# Altium PCB Copy of DAQ.PcbDoc (part 2 of 2)
Units mil, origin at the board's own origin, x right, y up, seen from the top; angles counter-clockwise.
Board outline 2793.12 x 2548.73 mil, 4 copper layers (Top Layer, GND, 3V3, Bottom Layer), stack 23.756 mil thick; 148 components, 93 nets, 486 pads, 25 vias.
Unrouted connection lines stored in the file: 356.
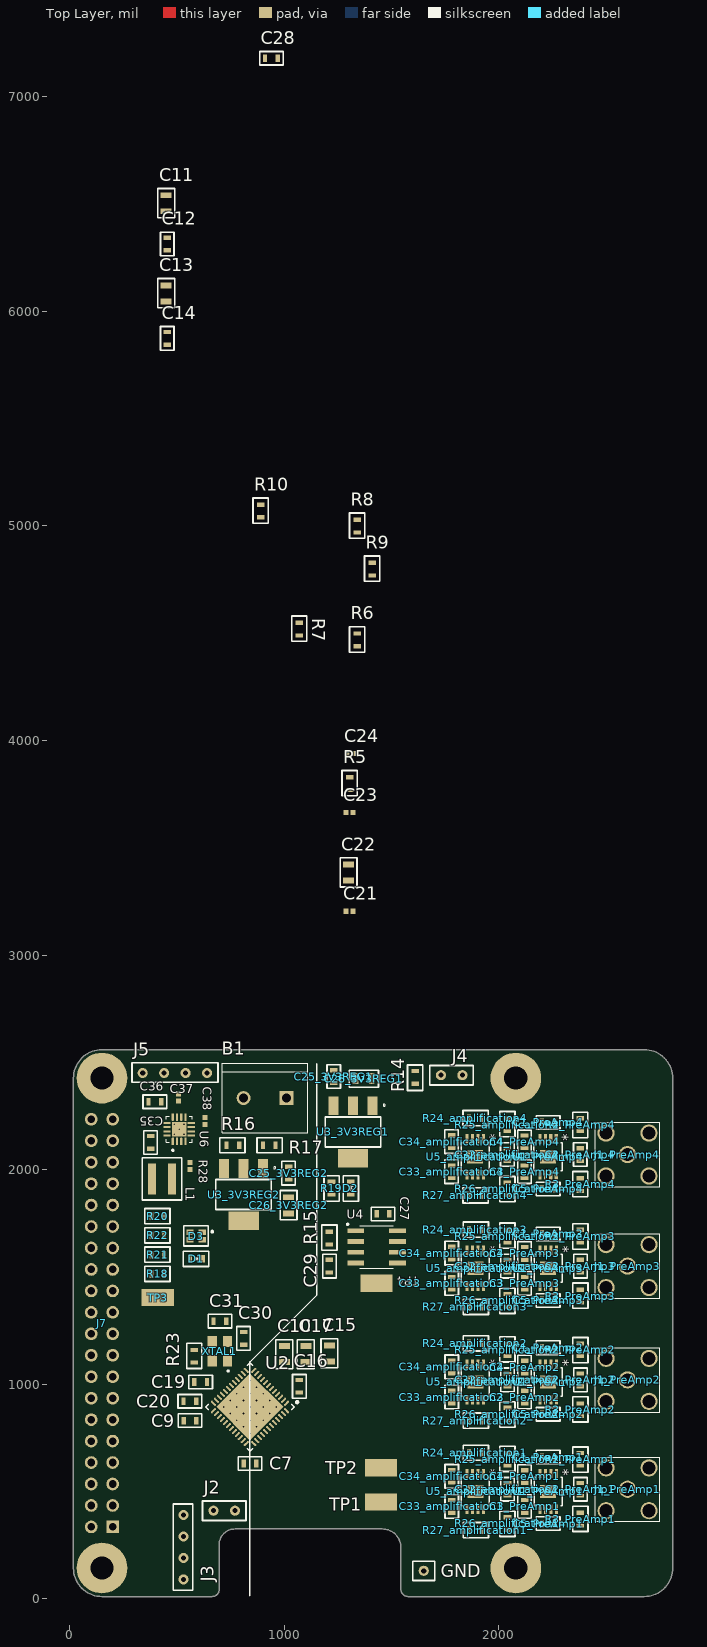
[diagram p0: Top Layer view]

## Part data (continued)
D1 D2: library part LTST-C191KGKT, "LED Uni-Color Green 574nm 2-Pin Chip LED T/R", Case/Package=0603, Case Code (Metric)=1608, Color=Green, Forward Current=30mA, Forward Voltage=2V, Lens Color=Colorless, Manufacturer 1="Vishay Lite-On", Max Operating Temperature=85°C, Min Operating Temperature=-55°C, Package Quantity=1, Power Dissipation=75mW, Reverse Voltage=5V, Supplier Part Number 1=160-1446-1-ND, Test Current=20mA, Case Code (Imperial)=0603, ComponentLink1Description=https://datasheet.ciiva.com/12400/100-ltst-c191kgkt-53586-12400818.pdf?src-supplier=Mouser, ComponentLink1URL=https://datasheet.ciiva.com/12400/100-ltst-c191kgkt-53586-12400818.pdf?src-supplier=Mouser, ComponentLink2Description=https://datasheet.ciiva.com/11773/0900766b80dc02b1-11773629.pdf?src-supplier=RSComponents, ComponentLink2URL=https://datasheet.ciiva.com/11773/0900766b80dc02b1-11773629.pdf?src-supplier=RSComponents, ComponentLink3Description=https://datasheet.ciiva.com/16215/ltst-c191kgkt-16215151.pdf?src-supplier=Future+Electronics, ComponentLink3URL=https://datasheet.ciiva.com/16215/ltst-c191kgkt-16215151.pdf?src-supplier=Future+Electronics, ComponentLink4Description=https://datasheet.ciiva.com/2109/s-110-ltst-c191kgkt-2109973.pdf?src-supplier=Digi-Key, ComponentLink4URL=https://datasheet.ciiva.com/2109/s-110-ltst-c191kgkt-2109973.pdf?src-supplier=Digi-Key, ComponentLink5Description=https://datasheet.ciiva.com/2109/s-110-ltst-c191kgkt-2109974.pdf?src-supplier=Digi-Key, ComponentLink5URL=https://datasheet.ciiva.com/2109/s-110-ltst-c191kgkt-2109974.pdf?src-supplier=Digi-Key, ComponentLink6Description=https://datasheet.ciiva.com/2109/s-110-ltst-c191kgkt-2109975.pdf?src-supplier=Digi-Key, ComponentLink6URL=https://datasheet.ciiva.com/2109/s-110-ltst-c191kgkt-2109975.pdf?src-supplier=Digi-Key, ComponentLink7Description=https://datasheet.ciiva.com/15223/getdatasheetpartid-103913-15223276.pdf?src-supplier=Verical, ComponentLink7URL=https://datasheet.ciiva.com/15223/getdatasheetpartid-103913-15223276.pdf?src-supplier=Verical, Depth=0.8mm, Dominant Wavelength=571nm, Height=0.55mm, Illumination Color=Green, Lead Free="Lead Free", Length=1.6mm, Lens Style=Diffused,Colorless,Rectangular,Clear, Lens Transparency=Clear, Luminous Intensity=35mcd, Manufacturer Part Number 1=LTST-C191KGKT, Mount="Surface Mount", Number of Elements=1, Number of LEDs=1, Number of Pins=2, Packaging="Tape and Reel", Power Rating=75mW, Pricing 1="1=0.28000, 10=0.20100, 100=0.09540, 500=0.06364, 1000=0.04984, 2500=0.04878 (USD)", Radiation Hardening=No, RoHS=Yes, Stock 1=1002642, Supplier 1=Digi-Key, Viewing Angle=130°, Wavelength=574nm, Width=0.8mm
D3: library part LTST-C19HE1WT, "Lite-On LTST-C19HE1WT, LTST Series 3 RGB LED, 470 / 525 / 624 nm 3-Pin, Rectangle Lens SMD package", Case/Package=0606, Case Code (Metric)=1616, Color=Blue,Green,Red, Forward Current=20mA, Forward Voltage=3.35V, Lens Color=White, Manufacturer 1="Vishay Lite-On", Max Operating Temperature=80°C, Min Operating Temperature=-20°C, Package Quantity=3000, Reverse Voltage=5V, Supplier Part Number 1=160-2162-1-ND, Case Code (Imperial)=0606, ComponentLink1Description=https://datasheet.ciiva.com/11773/0900766b80dc0566-11773828.pdf?src-supplier=RSComponents, ComponentLink1URL=https://datasheet.ciiva.com/11773/0900766b80dc0566-11773828.pdf?src-supplier=RSComponents, ComponentLink2Description=https://datasheet.ciiva.com/41805/s-110-ltst-c19he1wt-41805918.pdf?src-supplier=Digi-Key, ComponentLink2URL=https://datasheet.ciiva.com/41805/s-110-ltst-c19he1wt-41805918.pdf?src-supplier=Digi-Key, Depth=1.6mm, Dominant Wavelength=470nm, Height=0.35mm, Lead Free="Lead Free", Length=1.6mm, Lens Style=Diffused,Colorless,Rectangular, Lens Transparency=Diffused, Luminous Intensity=180mcd, Manufacturer Part Number 1=LTST-C19HE1WT, Mount="Surface Mount", Number of Elements=3, Number of LEDs=3, Number of Pins=4, Packaging="Tape and Reel", Pricing 1="1=0.56000, 10=0.40500, 100=0.26440, 500=0.19008, 1000=0.14875 (USD)", Radiation Hardening=No, RoHS=Yes, Stock 1=98926, Supplier 1=Digi-Key, Test Current=20mA, Viewing Angle=130°, Width=1.6mm
J1_PreAmp1 J1_PreAmp2 J1_PreAmp3 J1_PreAmp4: library part hydrophone_connector
J2 J4: library part J2
J3 J5: library part J4
J7: library part RASPI_4
L1: library part 74438357022, "INDUCTOR, 2.2UH, 5.2A, 20%, SHIELDED", Case/Package=Nonstandard, Current Rating=5.2A, DC Resistance (DCR)=26mR, Manufacturer 1="Wurth Electronics", Max Operating Temperature=125°C, Min Operating Temperature=-40°C, Saturation Current=7A, Self Resonant Frequency=35MHz, Supplier Part Number 1=732-11201-1-ND, Test Frequency=100kHz, Tolerance=20%, ComponentLink1Description=http://www.farnell.com/datasheets/2579569.pdf?src-supplier=Farnell, ComponentLink1URL=http://www.farnell.com/datasheets/2579569.pdf?src-supplier=Farnell, ComponentLink2Description=https://katalog.we-online.de/pbs/datasheet/74438357022.pdf?src-supplier=Digi-Key, ComponentLink2URL=https://katalog.we-online.de/pbs/datasheet/74438357022.pdf?src-supplier=Digi-Key, ComponentLink3Description=http://www.farnell.com/datasheets/2579569.pdf?src-supplier=Newark, ComponentLink3URL=http://www.farnell.com/datasheets/2579569.pdf?src-supplier=Newark, Core Material=Metal,Composite, Inductance=2.2uH, Manufacturer Part Number 1=74438357022, Mount="Surface Mount", Packaging="Cut Tape", Pricing 1="1=1.58000, 10=1.50700, 50=1.45200, 100=1.32000 (USD)", RoHS=No, Shielding=Shielded, Stock 1=1686, Supplier 1=Digi-Key
R1_PreAmp1 R1_PreAmp2 R1_PreAmp3 R1_PreAmp4 R4_PreAmp1 R4_PreAmp2 R4_PreAmp3 R4_PreAmp4: library part MCT06030C1004FP500, "RES SMD 1M OHM 1% 1/8W 0603", Case/Package=0603, Case Code (Metric)=1608, Manufacturer 1="Vishay Beyschlag", Max Operating Temperature=125°C, Max Power Dissipation=125mW, Min Operating Temperature=-55°C, Package Quantity=1, Power Rating=100mW, Resistance=1MR, Supplier Part Number 1=MCT0603-1.00M-CFCT-ND, Temperature Coefficient=50ppm/°C, Tolerance=1%, Voltage Rating=75V, Case Code (Imperial)=0603, ComponentLink1Description=https://datasheet.ciiva.com/2470/mc-pro-2470384.pdf?src-supplier=Digi-Key, ComponentLink1URL=https://datasheet.ciiva.com/2470/mc-pro-2470384.pdf?src-supplier=Digi-Key, ComponentLink2Description=https://datasheet.ciiva.com/2470/mc-pro-2470385.pdf?src-supplier=Digi-Key, ComponentLink2URL=https://datasheet.ciiva.com/2470/mc-pro-2470385.pdf?src-supplier=Digi-Key, ComponentLink3Description=https://datasheet.ciiva.com/2470/mc-pro-2470386.pdf?src-supplier=Digi-Key, ComponentLink3URL=https://datasheet.ciiva.com/2470/mc-pro-2470386.pdf?src-supplier=Digi-Key, ComponentLink4Description=https://datasheet.ciiva.com/9112/mc-pro-9112535.pdf?src-supplier=Avnet, ComponentLink4URL=https://datasheet.ciiva.com/9112/mc-pro-9112535.pdf?src-supplier=Avnet, ComponentLink5Description=https://datasheet.ciiva.com/16893/mc-pro-16893006.pdf?src-supplier=Avnet+Europe, ComponentLink5URL=https://datasheet.ciiva.com/16893/mc-pro-16893006.pdf?src-supplier=Avnet+Europe, Composition="Thin Film", Contact Plating=Tin, Depth=0.85mm, Height=0.022inch, Lead Free="Lead Free", Length=0.061inch, Manufacturer Part Number 1=MCT06030C1004FP500, Military Standard=Not, Mount="Surface Mount", Number of Terminations=2, Packaging="Tape and Reel", Pricing 1="1=0.18000, 10=0.15200, 100=0.05960, 1000=0.02495, 2500=0.02287 (USD)", Radiation Hardening=No, REACH SVHC=Unknown, RoHS=Yes, Stock 1=189743, Supplier 1=Digi-Key, Termination=SMD/SMT, Voltage Rating (DC)=75V, Weight=7.1E-05oz, Width=0.033inch
R2_PreAmp1 R2_PreAmp2 R2_PreAmp3 R2_PreAmp4 R3_PreAmp1 R3_PreAmp2 R3_PreAmp3 R3_PreAmp4: library part MCT06030C3300FP500, "RES SMD 330 OHM 1% 1/8W 0603", Case/Package=0603, Case Code (Metric)=1608, Manufacturer 1="Vishay Beyschlag", Max Operating Temperature=125°C, Max Power Dissipation=125mW, Min Operating Temperature=-55°C, Package Quantity=1, Resistance=330R, Supplier Part Number 1=MCT0603-330-CFCT-ND, Temperature Coefficient=50ppm/°C, Tolerance=1%, Voltage Rating=75V, Case Code (Imperial)=0603, ComponentLink1Description=https://datasheet.ciiva.com/2470/mc-pro-2470441.pdf?src-supplier=Digi-Key, ComponentLink1URL=https://datasheet.ciiva.com/2470/mc-pro-2470441.pdf?src-supplier=Digi-Key, ComponentLink2Description=https://datasheet.ciiva.com/2470/mc-pro-2470442.pdf?src-supplier=Digi-Key, ComponentLink2URL=https://datasheet.ciiva.com/2470/mc-pro-2470442.pdf?src-supplier=Digi-Key, ComponentLink3Description=https://datasheet.ciiva.com/2470/mc-pro-2470443.pdf?src-supplier=Digi-Key, ComponentLink3URL=https://datasheet.ciiva.com/2470/mc-pro-2470443.pdf?src-supplier=Digi-Key, ComponentLink4Description=https://datasheet.ciiva.com/16892/mc-pro-16892683.pdf?src-supplier=Avnet+Europe, ComponentLink4URL=https://datasheet.ciiva.com/16892/mc-pro-16892683.pdf?src-supplier=Avnet+Europe, ComponentLink5Description=https://datasheet.ciiva.com/8898/mc-pro-8898943.pdf?src-supplier=Avnet, ComponentLink5URL=https://datasheet.ciiva.com/8898/mc-pro-8898943.pdf?src-supplier=Avnet, Composition="Thin Film", Contact Plating=Tin, Depth=0.85mm, Height=0.022inch, Lead Free="Lead Free", Length=0.061inch, Manufacturer Part Number 1=MCT06030C3300FP500, Military Standard=Not, Number of Terminations=2, Packaging="Tape and Reel", Power Rating=125mW, Pricing 1="1=0.18000, 10=0.15200, 100=0.05960, 1000=0.02495, 2500=0.02287 (USD)", Radiation Hardening=No, REACH SVHC="No SVHC", RoHS=Yes, Stock 1=133742, Supplier 1=Digi-Key, Voltage Rating (DC)=75V, Width=0.033inch
R5 R7 R8 R9 R10 R14: library part TNPW060310K0BEEA, "RES 10K OHM 0.1% 1/8W 0603", Case/Package=0603, Case Code (Metric)=1608, Manufacturer 1="Vishay Dale", Max Operating Temperature=125°C, Max Power Dissipation=100mW, Min Operating Temperature=-55°C, Package Quantity=1, Resistance=10kR, Supplier Part Number 1=TNP10.0KAACT-ND, Temperature Coefficient=25ppm/°C, Tolerance=1%, Voltage Rating=75V, Case Code (Imperial)=0603, ComponentLink1Description=https://datasheet.ciiva.com/2483/tnpw-e3-2483253.pdf?src-supplier=Digi-Key, ComponentLink1URL=https://datasheet.ciiva.com/2483/tnpw-e3-2483253.pdf?src-supplier=Digi-Key, ComponentLink2Description=https://datasheet.ciiva.com/17190/tnpw-e3-17190917.pdf?src-supplier=Avnet+Europe, ComponentLink2URL=https://datasheet.ciiva.com/17190/tnpw-e3-17190917.pdf?src-supplier=Avnet+Europe, ComponentLink3Description=https://datasheet.ciiva.com/2483/tnpw-e3-2483254.pdf?src-supplier=Digi-Key, ComponentLink3URL=https://datasheet.ciiva.com/2483/tnpw-e3-2483254.pdf?src-supplier=Digi-Key, ComponentLink4Description=https://datasheet.ciiva.com/2483/tnpw-e3-2483255.pdf?src-supplier=Digi-Key, ComponentLink4URL=https://datasheet.ciiva.com/2483/tnpw-e3-2483255.pdf?src-supplier=Digi-Key, ComponentLink5Description=https://datasheet.ciiva.com/16335/tnpw-e3-16335132.pdf?src-supplier=Future+Electronics, ComponentLink5URL=https://datasheet.ciiva.com/16335/tnpw-e3-16335132.pdf?src-supplier=Future+Electronics, ComponentLink6Description=https://datasheet.ciiva.com/28589/1912606-28589004.pdf?src-supplier=Element14, ComponentLink6URL=https://datasheet.ciiva.com/28589/1912606-28589004.pdf?src-supplier=Element14, ComponentLink7Description=https://datasheet.ciiva.com/7792/tnpw-e3-7792477.pdf?src-supplier=Element14, ComponentLink7URL=https://datasheet.ciiva.com/7792/tnpw-e3-7792477.pdf?src-supplier=Element14, ComponentLink8Description=https://datasheet.ciiva.com/9050/tnpw-e3-9050974.pdf?src-supplier=Avnet, ComponentLink8URL=https://datasheet.ciiva.com/9050/tnpw-e3-9050974.pdf?src-supplier=Avnet, Composition="Thin Film", Contact Plating=Tin, Depth=0.85mm, Features="Moisture Resistant,Automotive AEC-Q200,Anti-Sulfur", Height=0.022inch, Length=1.6mm, Manufacturer Part Number 1=TNPW060310K0BEEA, Military Standard=Not, Mount="Surface Mount", Number of Terminations=2, Packaging="Tape and Reel", Power Rating=100mW, Pricing 1="1=0.65000, 10=0.46200, 100=0.24020, 1000=0.12936, 2500=0.12760 (USD)", Radiation Hardening=No, REACH SVHC=Unknown, RoHS=Yes, Stock 1=296181, Supplier 1=Digi-Key, Termination=SMD/SMT, Weight=7.1E-05oz, Width=0.033inch
R6: library part TNPW06031K00BEEA, "RES 1K OHM 0.1% 1/8W 0603", Case/Package=0603, Case Code (Metric)=1608, Manufacturer 1="Vishay Dale", Max Operating Temperature=125°C, Max Power Dissipation=100mW, Min Operating Temperature=-55°C, Package Quantity=1, Resistance=1kR, Supplier Part Number 1=TNP1.00KAACT-ND, Temperature Coefficient=25ppm/°C, Tolerance=1%, Voltage Rating=75V, Case Code (Imperial)=0603, ComponentLink1Description=https://datasheet.ciiva.com/2528/tnpw-e3-2528472.pdf?src-supplier=Digi-Key, ComponentLink1URL=https://datasheet.ciiva.com/2528/tnpw-e3-2528472.pdf?src-supplier=Digi-Key, ComponentLink2Description=https://datasheet.ciiva.com/2528/tnpw-e3-2528473.pdf?src-supplier=Digi-Key, ComponentLink2URL=https://datasheet.ciiva.com/2528/tnpw-e3-2528473.pdf?src-supplier=Digi-Key, ComponentLink3Description=https://datasheet.ciiva.com/9112/tnpw-e3-9112138.pdf?src-supplier=Avnet, ComponentLink3URL=https://datasheet.ciiva.com/9112/tnpw-e3-9112138.pdf?src-supplier=Avnet, ComponentLink4Description=https://datasheet.ciiva.com/16391/tnpw-e3-16391675.pdf?src-supplier=Future+Electronics, ComponentLink4URL=https://datasheet.ciiva.com/16391/tnpw-e3-16391675.pdf?src-supplier=Future+Electronics, ComponentLink5Description=https://datasheet.ciiva.com/9112/tnpw-e3-9112141.pdf?src-supplier=Avnet, ComponentLink5URL=https://datasheet.ciiva.com/9112/tnpw-e3-9112141.pdf?src-supplier=Avnet, ComponentLink6Description=https://datasheet.ciiva.com/16782/70201627-16782047.pdf?src-supplier=Allied+Electronics, ComponentLink6URL=https://datasheet.ciiva.com/16782/70201627-16782047.pdf?src-supplier=Allied+Electronics, Composition="Thin Film", Contact Plating=Tin, Depth=0.85mm, Features="Moisture Resistant,Automotive AEC-Q200,Anti-Sulfur", Height=0.45mm, Lead Free="Lead Free", Length=1.6mm, Manufacturer Part Number 1=TNPW06031K00BEEA, Military Standard=Not, Mount="Surface Mount", Number of Terminations=2, Packaging="Tape and Reel", Power Rating=100mW, Pricing 1="1=0.65000, 10=0.46200, 100=0.24020, 1000=0.12936, 2500=0.12760 (USD)", Radiation Hardening=No, REACH SVHC=Unknown, RoHS=Yes, Stock 1=92047, Supplier 1=Digi-Key, Termination=SMD/SMT, Voltage Rating (DC)=75V, Weight=7.1E-05oz, Width=0.033inch
R11 R12: library part TNPW06032K00BEEA, "RES 2K OHM 0.1% 1/8W 0603", Case/Package=0603, Case Code (Metric)=1608, Manufacturer 1="Vishay Dale", Max Operating Temperature=125°C, Max Power Dissipation=100mW, Min Operating Temperature=-55°C, Package Quantity=1, Resistance=2kR, Supplier Part Number 1=TNP2.00KAACT-ND, Temperature Coefficient=25ppm/°C, Tolerance=1%, Voltage Rating=75V, Voltage Rating (DC)=50V, Case Code (Imperial)=0603, ComponentLink1Description=https://datasheet.ciiva.com/17202/tnpw-e3-17202951.pdf?src-supplier=Avnet+Europe, ComponentLink1URL=https://datasheet.ciiva.com/17202/tnpw-e3-17202951.pdf?src-supplier=Avnet+Europe, ComponentLink2Description=https://datasheet.ciiva.com/28621/1599293-28621623.pdf?src-supplier=Element14, ComponentLink2URL=https://datasheet.ciiva.com/28621/1599293-28621623.pdf?src-supplier=Element14, ComponentLink3Description=https://datasheet.ciiva.com/9094/tnpw-e3-9094713.pdf?src-supplier=Avnet, ComponentLink3URL=https://datasheet.ciiva.com/9094/tnpw-e3-9094713.pdf?src-supplier=Avnet, ComponentLink4Description=https://datasheet.ciiva.com/2483/tnpw-e3-2483322.pdf?src-supplier=Digi-Key, ComponentLink4URL=https://datasheet.ciiva.com/2483/tnpw-e3-2483322.pdf?src-supplier=Digi-Key, ComponentLink5Description=https://datasheet.ciiva.com/2483/tnpw-e3-2483323.pdf?src-supplier=Digi-Key, ComponentLink5URL=https://datasheet.ciiva.com/2483/tnpw-e3-2483323.pdf?src-supplier=Digi-Key, ComponentLink6Description=https://datasheet.ciiva.com/2483/tnpw-e3-2483324.pdf?src-supplier=Digi-Key, ComponentLink6URL=https://datasheet.ciiva.com/2483/tnpw-e3-2483324.pdf?src-supplier=Digi-Key, Composition="Thin Film", Contact Plating=Tin, Depth=0.85mm, Features="Moisture Resistant,Automotive AEC-Q200,Anti-Sulfur", Height=0.45mm, Lead Free="Lead Free", Length=1.6mm, Manufacturer Part Number 1=TNPW06032K00BEEA, Military Standard=Not, Number of Terminations=2, Packaging="Tape and Reel", Power Rating=100mW, Pricing 1="1=0.65000, 10=0.46200, 100=0.24020, 1000=0.12936, 2500=0.12760 (USD)", Radiation Hardening=No, REACH SVHC=Unknown, RoHS=Yes, Stock 1=36426, Supplier 1=Digi-Key, Termination=SMD/SMT, Weight=7.1E-05oz, Width=0.033inch
R15 R24_amplification1 R24_amplification2 R24_amplification3 R24_amplification4 R27_amplification1 R27_amplification2 R27_amplification3 R27_amplification4: library part CRGCQ0603F150K, "CRGCQ 0603 150K 1%", Case/Package=0603, Case Code (Metric)=1608, Manufacturer 1=Yageo, Manufacturer Part Number 1=RC0603JR-0710KL, Max Operating Temperature=155°C, Min Operating Temperature=-55°C, Power Rating=100mW, Resistance=10kR, Supplier Part Number 1=311-10KGRCT-ND, Temperature Coefficient=100ppm/°C, Tolerance=5%, Voltage Rating=50V, Case Code (Imperial)=0603, ComponentLink1Description=https://datasheet.ciiva.com/2452/pyu-rc0603-51-rohs-l-4-2452848.pdf?src-supplier=Digi-Key, ComponentLink1URL=https://datasheet.ciiva.com/2452/pyu-rc0603-51-rohs-l-4-2452848.pdf?src-supplier=Digi-Key, ComponentLink2Description=https://datasheet.ciiva.com/7746/443971-7746427.pdf?src-supplier=Element14, ComponentLink2URL=https://datasheet.ciiva.com/7746/443971-7746427.pdf?src-supplier=Element14, ComponentLink3Description=https://datasheet.ciiva.com/22747/443971-22747531.pdf?src-supplier=Element14, ComponentLink3URL=https://datasheet.ciiva.com/22747/443971-22747531.pdf?src-supplier=Element14, ComponentLink4Description=https://datasheet.ciiva.com/7746/443971-7746428.pdf?src-supplier=Element14, ComponentLink4URL=https://datasheet.ciiva.com/7746/443971-7746428.pdf?src-supplier=Element14, ComponentLink5Description=https://datasheet.ciiva.com/15189/getdatasheetpartid-327958-15189847.pdf?src-supplier=Verical, ComponentLink5URL=https://datasheet.ciiva.com/15189/getdatasheetpartid-327958-15189847.pdf?src-supplier=Verical, ComponentLink6Description=https://datasheet.ciiva.com/8883/pyu-rc0603-51-rohs-l-4-8883049.pdf?src-supplier=Avnet, ComponentLink6URL=https://datasheet.ciiva.com/8883/pyu-rc0603-51-rohs-l-4-8883049.pdf?src-supplier=Avnet, Composition="Thick Film", Contact Plating=Tin,Matte, Depth=0.8mm, Lead Free="Lead Free", Length=1.6mm, Military Standard=Not, Number of Pins=2, Packaging="Tape and Reel", Pricing 1="1=0.10000, 10=0.01700, 100=0.00710, 1000=0.00318, 2500=0.00276 (USD)", Radiation Hardening=No, REACH SVHC=Unknown, RoHS=Yes, Stock 1=22910838, Supplier 1=Digi-Key, Termination=SMD/SMT, Voltage Rating (DC)=50V, Width=0.8mm
R16: library part MCT06030E2002BP500, "Res Thin Film 0603 20K Ohm 0.1% 0.1W(1/10W) ±15ppm/C Molded SMD Automotive Medical Paper T/R", Case/Package=0603, Manufacturer 1="Vishay Semiconductors", Max Operating Temperature=125°C, Min Operating Temperature=-55°C, Resistance=20kR, Supplier Part Number 1=749-1747-1-ND, Temperature Coefficient=15ppm/°C, Tolerance=0.1%, ComponentLink1Description=https://datasheet.ciiva.com/17185/mc-pre-17185448.pdf?src-supplier=Avnet+Europe, ComponentLink1URL=https://datasheet.ciiva.com/17185/mc-pre-17185448.pdf?src-supplier=Avnet+Europe, ComponentLink2Description=https://datasheet.ciiva.com/8897/mc-pre-8897916.pdf?src-supplier=Avnet, ComponentLink2URL=https://datasheet.ciiva.com/8897/mc-pre-8897916.pdf?src-supplier=Avnet, Composition="Thin Film", Contact Plating=Tin, Depth=0.85mm, Lead Free="Lead Free", Length=1.55mm, Manufacturer Part Number 1=MCT06030E2002BP500, Military Standard=Not, Packaging="Tape and Reel", Pricing 1="1=0.70000, 10=0.58600, 100=0.39360, 1000=0.23128 (USD)", Radiation Hardening=No, RoHS=Yes, Stock 1=75960, Supplier 1=Digi-Key
R17: library part ERA-3AEB103V, "PANASONIC - ERA-3AEB103V - RES, METAL FILM, 10K, 0.1%, 0.1W, 0603,", Case/Package=0603, Case Code (Metric)=1608, Manufacturer 1=Panasonic, Max Operating Temperature=155°C, Max Power Dissipation=100mW, Min Operating Temperature=-55°C, Package Quantity=5000, Resistance=10kR, Supplier Part Number 1=P10KDBCT-ND, Temperature Coefficient=25ppm/°C, Tolerance=0.1%, Voltage Rating=75V, Case Code (Imperial)=0603, ComponentLink1Description=https://datasheet.ciiva.com/5734/485442-5734528.pdf?src-supplier=Farnell, ComponentLink1URL=https://datasheet.ciiva.com/5734/485442-5734528.pdf?src-supplier=Farnell, ComponentLink2Description=https://datasheet.ciiva.com/11808/0900766b80fe20f7-11808028.pdf?src-supplier=RSComponents, ComponentLink2URL=https://datasheet.ciiva.com/11808/0900766b80fe20f7-11808028.pdf?src-supplier=RSComponents, ComponentLink3Description=https://datasheet.ciiva.com/29183/451250-da-01-en-widerstand-0603-era-29183809.pdf?src-supplier=Conrad, ComponentLink3URL=https://datasheet.ciiva.com/29183/451250-da-01-en-widerstand-0603-era-29183809.pdf?src-supplier=Conrad, ComponentLink4Description=https://datasheet.ciiva.com/9194/aoa0000ce26-9194213.pdf?src-supplier=Avnet, ComponentLink4URL=https://datasheet.ciiva.com/9194/aoa0000ce26-9194213.pdf?src-supplier=Avnet, ComponentLink5Description=https://datasheet.ciiva.com/46376/485442-46376357.pdf?src-supplier=Element14, ComponentLink5URL=https://datasheet.ciiva.com/46376/485442-46376357.pdf?src-supplier=Element14, ComponentLink6Description=https://datasheet.ciiva.com/17212/aoa0000ce26-17212070.pdf?src-supplier=Avnet+Europe, ComponentLink6URL=https://datasheet.ciiva.com/17212/aoa0000ce26-17212070.pdf?src-supplier=Avnet+Europe, ComponentLink7Description=https://datasheet.ciiva.com/46422/1776116-46422520.pdf?src-supplier=Element14, ComponentLink7URL=https://datasheet.ciiva.com/46422/1776116-46422520.pdf?src-supplier=Element14, ComponentLink8Description=https://datasheet.ciiva.com/16427/aoa0000ce26-16427097.pdf?src-supplier=Future+Electronics, ComponentLink8URL=https://datasheet.ciiva.com/16427/aoa0000ce26-16427097.pdf?src-supplier=Future+Electronics, ComponentLink9Description=https://datasheet.ciiva.com/24072/aoa0000ce26-197354-24072585.pdf?src-supplier=Mouser, ComponentLink9URL=https://datasheet.ciiva.com/24072/aoa0000ce26-197354-24072585.pdf?src-supplier=Mouser, ComponentLink10Description=https://datasheet.ciiva.com/46388/1776116-46388109.pdf?src-supplier=Element14, ComponentLink10URL=https://datasheet.ciiva.com/46388/1776116-46388109.pdf?src-supplier=Element14, ComponentLink11Description=https://datasheet.ciiva.com/30126/54aoa0000ce26-30126478.pdf?src-supplier=Onlinecomponents.com, ComponentLink11URL=https://datasheet.ciiva.com/30126/54aoa0000ce26-30126478.pdf?src-supplier=Onlinecomponents.com, ComponentLink12Description=https://datasheet.ciiva.com/46388/485442-46388110.pdf?src-supplier=Element14, ComponentLink12URL=https://datasheet.ciiva.com/46388/485442-46388110.pdf?src-supplier=Element14, ComponentLink13Description=https://datasheet.ciiva.com/5734/aoa0000ce26-5734527.pdf?src-supplier=Farnell, ComponentLink13URL=https://datasheet.ciiva.com/5734/aoa0000ce26-5734527.pdf?src-supplier=Farnell, Composition="Thin Film,Metal Film", Contact Plating=Tin, Depth=0.8mm, Height=0.45mm, Lead Free="Lead Free", Length=1.6mm, Manufacturer Part Number 1=ERA-3AEB103V, Military Standard=Not, Mount="Surface Mount", Number of Pins=2, Number of Terminations=2, Packaging="Tape and Reel", Power Rating=100mW, Pricing 1="1=0.35000, 10=0.30000, 100=0.11720, 1000=0.04906, 2500=0.04498 (USD)", Radiation Hardening=No, REACH SVHC="No SVHC", RoHS=Yes, Stock 1=1877208, Supplier 1=Digi-Key, Termination=SMD/SMT, Voltage Rating (DC)=75V, Width=0.8mm
R18 R19 R20 R21 R22: library part CRCW060364R9FKEA, "RES SMD 64.9 OHM 1% 1/10W 0603", Case/Package=0603, Case Code (Metric)=1608, Manufacturer 1=Vishay, Max Operating Temperature=155°C, Max Power Dissipation=100mW, Min Operating Temperature=-55°C, Package Quantity=10, Resistance=64.9R, Supplier Part Number 1=541-64.9HCT-ND, Temperature Coefficient=100ppm/°C, Tolerance=1%, Voltage Rating=75V, Case Code (Imperial)=0603, ComponentLink1Description=https://datasheet.ciiva.com/2525/dcrcwe3-2525456.pdf?src-supplier=Digi-Key, ComponentLink1URL=https://datasheet.ciiva.com/2525/dcrcwe3-2525456.pdf?src-supplier=Digi-Key, ComponentLink2Description=https://datasheet.ciiva.com/2525/dcrcwe3-2525457.pdf?src-supplier=Digi-Key, ComponentLink2URL=https://datasheet.ciiva.com/2525/dcrcwe3-2525457.pdf?src-supplier=Digi-Key, ComponentLink3Description=https://datasheet.ciiva.com/22705/1697337-22705559.pdf?src-supplier=Element14, ComponentLink3URL=https://datasheet.ciiva.com/22705/1697337-22705559.pdf?src-supplier=Element14, ComponentLink4Description=https://datasheet.ciiva.com/3257/dcrcwe3-3257816.pdf?src-supplier=Avnet, ComponentLink4URL=https://datasheet.ciiva.com/3257/dcrcwe3-3257816.pdf?src-supplier=Avnet, ComponentLink5Description=https://datasheet.ciiva.com/7823/1697337-7823000.pdf?src-supplier=Element14, ComponentLink5URL=https://datasheet.ciiva.com/7823/1697337-7823000.pdf?src-supplier=Element14, ComponentLink6Description=https://datasheet.ciiva.com/7823/1697337-7823001.pdf?src-supplier=Element14, ComponentLink6URL=https://datasheet.ciiva.com/7823/1697337-7823001.pdf?src-supplier=Element14, ComponentLink7Description=https://datasheet.ciiva.com/16204/dcrcwe3-16204218.pdf?src-supplier=Future+Electronics, ComponentLink7URL=https://datasheet.ciiva.com/16204/dcrcwe3-16204218.pdf?src-supplier=Future+Electronics, ComponentLink8Description=https://datasheet.ciiva.com/22674/1847332-22674604.pdf?src-supplier=Element14, ComponentLink8URL=https://datasheet.ciiva.com/22674/1847332-22674604.pdf?src-supplier=Element14, ComponentLink9Description=https://datasheet.ciiva.com/5541/dcrcwe3-109170-5541133.pdf?src-supplier=Mouser, ComponentLink9URL=https://datasheet.ciiva.com/5541/dcrcwe3-109170-5541133.pdf?src-supplier=Mouser, ComponentLink10Description=https://datasheet.ciiva.com/2525/dcrcwe3-2525455.pdf?src-supplier=Digi-Key, ComponentLink10URL=https://datasheet.ciiva.com/2525/dcrcwe3-2525455.pdf?src-supplier=Digi-Key, Composition="Thick Film", Contact Plating=Tin, Depth=0.85mm, Features="Automotive AEC-Q200", Height=0.02inch, Lead Free="Lead Free", Length=1.55mm, Manufacturer Part Number 1=CRCW060364R9FKEA, Military Standard=Not, Number of Pins=2, Number of Terminations=2, Packaging="Tape and Reel", Power Rating=100mW, Pricing 1="1=0.10000, 10=0.03600, 100=0.01460, 1000=0.00654, 2500=0.00568 (USD)", Radiation Hardening=No, REACH SVHC=Unknown, RoHS=Yes, Stock 1=18928, Supplier 1=Digi-Key, Termination=SMD/SMT, Voltage Rating (DC)=75V, Weight=7.1E-05oz, Width=0.033inch
R23: library part RP73PF1J121RBTDF, "TE CONNECTIVITY         RP73PF1J121RBTDF             SMD Chip Resistor, Thin Film, 121 ohm, 100 V, 0603 [1608 Metric], 166 mW,  0.1%, RN73 Series", Case/Package=0603, Case Code (Metric)=1608, Manufacturer 1="TE Connectivity", Max Operating Temperature=155°C, Max Power Dissipation=167mW, Min Operating Temperature=-55°C, Package Quantity=1000, Power Rating=166mW, Resistance=121R, Supplier Part Number 1=A110020CT-ND, Temperature Coefficient=25ppm/°C, Tolerance=0.1%, Voltage Rating=100V, Case Code (Imperial)=0603, ComponentLink1Description=https://datasheet.ciiva.com/7801/1635325-7801605.pdf?src-supplier=Element14, ComponentLink1URL=https://datasheet.ciiva.com/7801/1635325-7801605.pdf?src-supplier=Element14, ComponentLink2Description=https://datasheet.ciiva.com/18601/eng-ds-1773272-j-18601303.pdf?src-supplier=Digi-Key, ComponentLink2URL=https://datasheet.ciiva.com/18601/eng-ds-1773272-j-18601303.pdf?src-supplier=Digi-Key, ComponentLink3Description=https://datasheet.ciiva.com/18601/eng-ds-1773272-j-18601304.pdf?src-supplier=Digi-Key, ComponentLink3URL=https://datasheet.ciiva.com/18601/eng-ds-1773272-j-18601304.pdf?src-supplier=Digi-Key, ComponentLink4Description=https://datasheet.ciiva.com/18601/eng-ds-1773272-j-18601305.pdf?src-supplier=Digi-Key, ComponentLink4URL=https://datasheet.ciiva.com/18601/eng-ds-1773272-j-18601305.pdf?src-supplier=Digi-Key, Composition="Thin Film", Depth=0.8mm, Height=0.022inch, Length=0.061inch, Manufacturer Part Number 1=RP73PF1J121RBTDF, Mount="Surface Mount", Number of Terminations=2, Packaging="Tape and Reel", Pricing 1="1=0.66000, 10=0.48500, 100=0.28230 (USD)", REACH SVHC="No SVHC", RoHS=Yes, Stock 1=850, Supplier 1=Digi-Key, Termination=Solder, Voltage Rating (DC)=100V, Width=0.031inch
R25_amplification1 R25_amplification2 R25_amplification3 R25_amplification4 R26_amplification1 R26_amplification2 R26_amplification3 R26_amplification4: library part RC0603JR-0710KL, "RES SMD 10K OHM 5% 1/10W 0603"
R28: library part CRCW0402100KFKED, "RES SMD 100K OHM 1% 1/16W 0402", Capacitance=10uF, Case/Package=0603, Case Code (Metric)=1608, Dielectric=X5R, Dielectric Material=Ceramic, Max Operating Temperature=85°C, Min Operating Temperature=-55°C, Package Quantity=1, Tolerance=20%, Voltage Rating=25V, Case Code (Imperial)=0603, ComponentLink1Description=http://components.arrow.com/part/dataview/0323_06887183?src-supplier=Arrow+Europe, ComponentLink1URL=http://components.arrow.com/part/dataview/0323_06887183?src-supplier=Arrow+Europe, ComponentLink2Description=http://www.farnell.com/datasheets/2792994.pdf?src-supplier=Farnell, ComponentLink2URL=http://www.farnell.com/datasheets/2792994.pdf?src-supplier=Farnell, ComponentLink3Description=http://www.farnell.com/datasheets/2291921.pdf?src-supplier=Avnet, ComponentLink3URL=http://www.farnell.com/datasheets/2291921.pdf?src-supplier=Avnet, ComponentLink4Description=http://www.farnell.com/datasheets/2792994.pdf?src-supplier=Newark, ComponentLink4URL=http://www.farnell.com/datasheets/2792994.pdf?src-supplier=Newark, ComponentLink5Description=http://www.farnell.com/datasheets/2291921.pdf?src-supplier=Newark, ComponentLink5URL=http://www.farnell.com/datasheets/2291921.pdf?src-supplier=Newark, ComponentLink6Description=http://www.farnell.com/datasheets/2792994.pdf?src-supplier=Element14, ComponentLink6URL=http://www.farnell.com/datasheets/2792994.pdf?src-supplier=Element14, ComponentLink7Description=http://www.farnell.com/datasheets/1913358.pdf?src-supplier=Element14, ComponentLink7URL=http://www.farnell.com/datasheets/1913358.pdf?src-supplier=Element14, ComponentLink8Description=https://product.tdk.com/info/en/catalog/datasheets/mlcc_commercial_general_en.pdf?src-supplier=Digi-Key, ComponentLink8URL=https://product.tdk.com/info/en/catalog/datasheets/mlcc_commercial_general_en.pdf?src-supplier=Digi-Key, ComponentLink9Description=http://www.farnell.com/datasheets/2291921.pdf?src-supplier=RSComponents, ComponentLink9URL=http://www.farnell.com/datasheets/2291921.pdf?src-supplier=RSComponents, ComponentLink10Description=http://www.farnell.com/datasheets/2291921.pdf?src-supplier=Verical, ComponentLink10URL=http://www.farnell.com/datasheets/2291921.pdf?src-supplier=Verical, ComponentLink11Description=http://www.farnell.com/datasheets/2291921.pdf?src-supplier=Mouser, ComponentLink11URL=http://www.farnell.com/datasheets/2291921.pdf?src-supplier=Mouser, ComponentLink12Description=http://www.farnell.com/datasheets/2291921.pdf?src-supplier=Quest, ComponentLink12URL=http://www.farnell.com/datasheets/2291921.pdf?src-supplier=Quest, ComponentLink13Description=http://www.farnell.com/datasheets/2291921.pdf?src-supplier=TTI, ComponentLink13URL=http://www.farnell.com/datasheets/2291921.pdf?src-supplier=TTI, Composition=Ceramic, Depth=0.8mm, Height=0.8mm, Lead Free="Lead Free", Length=1.6mm, Mount="Surface Mount", Packaging="Tape and Reel", REACH SVHC="No SVHC", RoHS=Yes, Termination=SMD/SMT, Thickness=0.039inch, Voltage Rating (DC)=25V, Weight=7.1E-05oz, Width=0.8mm
TP1 TP2: "5029 SMD 0805 TP", Supplier Part Number 1=36-5029CT-ND, Supplier 1=Digi-Key
TP3 TP4: "RCT-0C SMD 0805 TP", Supplier Part Number 1=A106144CT-ND, Supplier 1=Digi-Key
U1_PreAmp1 U1_PreAmp2 U1_PreAmp3 U1_PreAmp4 U5_amplification1 U5_amplification2 U5_amplification3 U5_amplification4: "IC OPAMP DIFF 1 CIRCUIT 8MSOP", Case/Package=VSSOP, Dual Supply Voltage=1.65V, Input Bias Current=1uA, Input Offset Voltage (Vos)=50uV, Input Resistance=820MR, Manufacturer 1="Texas Instruments", Manufacturer Part Number 1=THS4121IDGNR, Max Dual Supply Voltage=1.75V, Max I/O Voltage=8mV, Max Input Voltage=-100mV, Max Operating Temperature=125°C, Max Power Dissipation=1.71W, Max Supply Voltage=3.5V, Min Dual Supply Voltage=1.5V, Min Operating Temperature=-40°C, Min Supply Voltage=3V, Nominal Supply Current=13.5mA, Operating Supply Current=1.35mA, Operating Supply Voltage=3.3V, Output Current per Channel=65mA, Package Quantity=1, Power Supply Rejection Ratio (PSRR)=68dB, Supplier Part Number 1=296-13343-1-ND, Voltage Gain=66dB, -3db Bandwidth=150MHz, Bandwidth=135MHz, Common Mode Rejection Ratio=64dB, ComponentLink1Description=http://www.ti.com/lit/ds/symlink/ths4551.pdf?src-supplier=Digi-Key, ComponentLink1URL=http://www.ti.com/lit/ds/symlink/ths4551.pdf?src-supplier=Digi-Key, ComponentLink2Description=http://www.ti.com/general/docs/lit/getliterature.tsp?genericPartNumber=THS4551&fileType=pdf&src-supplier=Farnell, ComponentLink2URL=http://www.ti.com/general/docs/lit/getliterature.tsp?genericPartNumber=THS4551&fileType=pdf&src-supplier=Farnell, ComponentLink3Description=http://www.farnell.com/datasheets/2148327.pdf?src-supplier=Element14, ComponentLink3URL=http://www.farnell.com/datasheets/2148327.pdf?src-supplier=Element14, ComponentLink4Description=https://octopart.com/click/track?ai=2118&ct=datasheets&sig=0013830&at=physicalpart&sid=370&ppid=71776714&hlid=24961842&src-supplier=TI+store, ComponentLink4URL=https://octopart.com/click/track?ai=2118&ct=datasheets&sig=0013830&at=physicalpart&sid=370&ppid=71776714&hlid=24961842&src-supplier=TI+store, ComponentLink5Description=http://sigma.octopart.com/49250154/technical_drawing/Texas-Instruments-THS4551IDGKT.pdf?src-supplier=TI+store, ComponentLink5URL=http://sigma.octopart.com/49250154/technical_drawing/Texas-Instruments-THS4551IDGKT.pdf?src-supplier=TI+store, ComponentLink6Description=http://datasheet.octopart.com/THS4551IDGKT-Texas-Instruments-datasheet-78835010.pdf?src-supplier=Element14, ComponentLink6URL=http://datasheet.octopart.com/THS4551IDGKT-Texas-Instruments-datasheet-78835010.pdf?src-supplier=Element14, ComponentLink7Description=http://datasheet.octopart.com/THS4551IDGKT-Texas-Instruments-datasheet-67294894.pdf?src-supplier=Newark, ComponentLink7URL=http://datasheet.octopart.com/THS4551IDGKT-Texas-Instruments-datasheet-67294894.pdf?src-supplier=Newark, ComponentLink8Description=https://www.te.com/commerce/DocumentDelivery/DDEController?Action=srchrtrv&DocNm=1773204-3&DocType=DS&DocLang=English&src-supplier=Digi-Key, ComponentLink8URL=https://www.te.com/commerce/DocumentDelivery/DDEController?Action=srchrtrv&DocNm=1773204-3&DocType=DS&DocLang=English&src-supplier=Digi-Key, ComponentLink9Description=https://www.te.com/commerce/DocumentDelivery/DDEController?Action=srchrtrv&amp;DocNm=1773204-3&amp;DocType=DS&amp;DocLang=English&src-supplier=Digi-Key, ComponentLink9URL=https://www.te.com/commerce/DocumentDelivery/DDEController?Action=srchrtrv&amp;DocNm=1773204-3&amp;DocType=DS&amp;DocLang=English&src-supplier=Digi-Key, ComponentLink10Description=https://datasheet.ciiva.com/15128/getdatasheetpartid-115582-15128262.pdf?src-supplier=Verical, ComponentLink10URL=https://datasheet.ciiva.com/15128/getdatasheetpartid-115582-15128262.pdf?src-supplier=Verical, ComponentLink11Description=https://datasheet.ciiva.com/26847/ths4121idgnr-26847456.pdf?src-supplier=IIIC, ComponentLink11URL=https://datasheet.ciiva.com/26847/ths4121idgnr-26847456.pdf?src-supplier=IIIC, ComponentLink12Description=https://datasheet.ciiva.com/1800/ths4121-1800147.pdf?src-supplier=Digi-Key, ComponentLink12URL=https://datasheet.ciiva.com/1800/ths4121-1800147.pdf?src-supplier=Digi-Key, ComponentLink13Description=https://datasheet.ciiva.com/1800/ths4121-1800148.pdf?src-supplier=Digi-Key, ComponentLink13URL=https://datasheet.ciiva.com/1800/ths4121-1800148.pdf?src-supplier=Digi-Key, ComponentLink14Description=https://datasheet.ciiva.com/1800/ths4121-1800149.pdf?src-supplier=Digi-Key, ComponentLink14URL=https://datasheet.ciiva.com/1800/ths4121-1800149.pdf?src-supplier=Digi-Key, ComponentLink15Description=https://datasheet.ciiva.com/2976/ths4120-2976327.pdf?src-supplier=Avnet, ComponentLink15URL=https://datasheet.ciiva.com/2976/ths4120-2976327.pdf?src-supplier=Avnet, Gain Bandwidth Product=135MHz, Lead Free="Lead Free", Mount="Surface Mount", Number of Amplifiers=1, Number of Channels=1, Number of Circuits=1, Number of Elements=1, Number of Pins=8, Packaging="Cut Tape", Power Dissipation=1.71W, Pricing 1="1=5.39000, 10=4.83900, 25=4.57440, 100=3.76110, 250=3.37480, 500=3.25280, 1000=2.70389 (USD)", Radiation Hardening=No, REACH SVHC="No SVHC", RoHS=No, Settling Time=60ns, Slew Rate=220V/µs, Stock 1=1273, Supplier 1=Digi-Key, Weight=0.000861oz
U2: library part CMP-0313-02423-1, "Continuous Time Data Acquisition ADC, 4-Channel, 16-Bit, -40 to 125 degC, 48-Pin QFN (CS-48-1), RoHS, Tray", Temperature Max="125 degC", Temperature Min="-40 degC", AVDD Max="3.6 V", AVDD Min="2.97 V", Channel=4, ComponentLink1Description="Manufacturer URL", ComponentLink1URL=http://www.analog.com/en/index.html, ComponentLink2Description=Datasheet, ComponentLink2URL=http://www.analog.com/media/en/technical-documentation/data-sheets/ADAR7251.pdf, ComponentLink3Description="Package Specification", ComponentLink3URL=http://www.analog.com/media/en/package-pcb-resources/package/pkg_pdf/lfcsp-cs-side-solderable/cs-48/CS_48_1.pdf, DatasheetVersion="Rev. 0", DVDD Max="1.98 V", DVDD Min="1.62 V", Mounting Technology="Surface Mount", Number of A/D Converters=4, PackageDescription="48-Pin Frame Chip Scale Package, Body 7 x 7 mm, Pitch 0.5 mm", PackageVersion=01/2014, Packing=Tray, PartNumber=ADAR7251WBCSZ, RoHS=TRUE, Sample Rate Max="1.8 MSPS"
U3_3V3REG1 U3_3V3REG2: library part LD1117S33CTR, "STMICROELECTRONICS         LD1117S33CTR            Fixed LDO Voltage Regulator, 5.3V to 15V, 1.1V Dropout, 3.3Vout, 950mAout, SOT-223-4", Case/Package=SOT-223, Dropout Voltage=1.1V, Input Bias Current=5mA, Manufacturer 1=STMicroelectronics, Max Input Voltage=15V, Max Operating Temperature=125°C, Max Output Current=1.3A, Max Output Voltage=3.3V, Max Power Dissipation=12W, Min Input Voltage=5.3V, Min Operating Temperature=-40°C, Output Current=950mA, Output Voltage Accuracy=1%, Package Quantity=1, Quiescent Current=10mA, Supplier Part Number 1=497-1241-1-ND, Accuracy=1%, ComponentLink1Description=https://datasheet.ciiva.com/19480/1390223-19480586.pdf?src-supplier=Jameco, ComponentLink1URL=https://datasheet.ciiva.com/19480/1390223-19480586.pdf?src-supplier=Jameco, ComponentLink2Description=https://datasheet.ciiva.com/1511/1776449-1511572.pdf?src-supplier=Element14, ComponentLink2URL=https://datasheet.ciiva.com/1511/1776449-1511572.pdf?src-supplier=Element14, ComponentLink3Description=https://datasheet.ciiva.com/16392/cd00000544-16392069.pdf?src-supplier=Future+Electronics, ComponentLink3URL=https://datasheet.ciiva.com/16392/cd00000544-16392069.pdf?src-supplier=Future+Electronics, ComponentLink4Description=https://datasheet.ciiva.com/2041/cd00000544-2041932.pdf?src-supplier=Digi-Key, ComponentLink4URL=https://datasheet.ciiva.com/2041/cd00000544-2041932.pdf?src-supplier=Digi-Key, ComponentLink5Description=https://datasheet.ciiva.com/7992/1776449-7992620.pdf?src-supplier=Element14, ComponentLink5URL=https://datasheet.ciiva.com/7992/1776449-7992620.pdf?src-supplier=Element14, ComponentLink6Description=https://datasheet.ciiva.com/2041/cd00000544-2041933.pdf?src-supplier=Digi-Key, ComponentLink6URL=https://datasheet.ciiva.com/2041/cd00000544-2041933.pdf?src-supplier=Digi-Key, ComponentLink7Description=https://datasheet.ciiva.com/2041/cd00000544-2041934.pdf?src-supplier=Digi-Key, ComponentLink7URL=https://datasheet.ciiva.com/2041/cd00000544-2041934.pdf?src-supplier=Digi-Key, Contact Plating=Tin,Matte, Height=1.8mm, Lead Free="Lead Free", Length=6.5mm, Manufacturer Part Number 1=LD1117S33CTR, Max Supply Voltage=15V, Min Output Voltage=3.3V, Min Supply Voltage=3.3V, Mount="Surface Mount", Nominal Output Voltage=3.3V, Number of Outputs=1, Number of Pins=4, Number of Regulators=1, Number of Terminals=4, Output Type=Fixed, Output Voltage=3.3V, Packaging="Tape and Reel", Polarity=Positive, Power Dissipation=12W, Pricing 1="1=0.41000, 10=0.35100, 100=0.26180, 500=0.20570, 1000=0.15895 (USD)", Radiation Hardening=No, REACH SVHC="No SVHC", RoHS=Yes, Stock 1=43539, Supplier 1=Digi-Key, Termination=SMD/SMT, Weight=0.01lb, Width=3.5mm
U6: "Buck Switching Regulator IC Positive Fixed 5V 1 Output 3A 16-VFQFN Exposed Pad", Package="VQFN-16 Texas Instruments", Supplier Part Number 1=296-40835-1-ND, Availability=Unavailable, MF="Texas Instruments", MP=TPS62133AQRGTRQ1, Price=None, SnapEDA_Link=https://www.snapeda.com/parts/TPS62133AQRGTRQ1/Texas%20Instruments/view-part/454614/?ref=snap, Supplier 1=Digi-Key
XTAL1: "Crystal 19.2MHz ±25ppm (Tol) ±30ppm (Stability) 12pF FUND 80Ohm 4-Pin Mini-CSMD T/R", Manufacturer 1="ECS International", Supplier Part Number 1=XC2452CT-ND, Manufacturer Part Number 1=ECS-192-12-33-AGM-TR, Pricing 1="1=0.56000, 10=0.46500, 50=0.41820, 100=0.37180, 500=0.35322 (USD)", Stock 1=1382, Supplier 1=Digi-Key
U4: ComponentLink1Description=OPA2325IDR, ComponentLink1URL=https://www.digikey.com/product-detail/en/texas-instruments/OPA2325IDR/296-45058-1-ND/6562060

## Free pads (board coordinates)
  round 236.22 hole 108.27: ""(150,142.8) ""(150,2426.26) ""(2079.13,142.8) ""(2079.13,2426.26)

## Via types
v1: diameter 19.68, hole 7.87, Top Layer to Bottom Layer, 25 vias

## Nets (pads, with @x,y where several pads share a name; then routed paths per layer and width w, separated by ;. In a path a pad name is that pad's centre, name@x,y a point inside that pad or via, vN(x,y) a via of type N, cw(c..) or ccw(c..) an arc to the next point about the centre after c; other vN are vias at no path point)
3V3_2: J3.2 R11.2 R12.2
3V3_RPI: D3.4 J7.1 R18.2
5V_Out: C35.2 J2.2 L1.2 R28.1 U6.14
9V: B1.2 C25_3V3REG1.2 C25_3V3REG2.2 C36.2 C37.2 R16.1 U3_3V3REG1.3 U3_3V3REG2.3 U6.10 U6.11 U6.12 U6.13
ADC_DATA0: J7.18 U2.26
ADC_DATA1: J7.15 U2.27
ADC_DATA2: J7.16 U2.28
ADC_DATA3: J7.13 U2.29
ADC_DATA4: J7.12 U2.30
ADC_DATA5: J7.11 U2.31
ADC_DATA6: J7.10 R7.2 U2.32
ADC_DATA7: J7.8 U2.33
AINN1: R24_amplification1.2 TP2.1 U2.45 U5_amplification1.4
AINN2: R24_amplification2.2 U2.47 U5_amplification2.4
AINN3: R24_amplification3.2 U2.3 U5_amplification3.4
AINN4: R24_amplification4.2 U2.5 U5_amplification4.4
AINP1: R27_amplification1.2 TP1.1 U2.44 U5_amplification1.5
AINP2: R27_amplification2.2 U2.46 U5_amplification2.5
AINP3: R27_amplification3.2 U2.2 U5_amplification3.5
AINP4: R27_amplification4.2 U2.4 U5_amplification4.5
AUXIN1: C29.2 R15.2 U2.6
AVDD: C3_PreAmp1.1 C3_PreAmp2.1 C3_PreAmp3.1 C3_PreAmp4.1 C4_PreAmp1.1 C4_PreAmp2.1 C4_PreAmp3.1 C4_PreAmp4.1 C10.2 C11.2 C12.1 C22.2 C24.2 C26_3V3REG1.2 C33_amplification1.1 C33_amplification2.1 C33_amplification3.1 C33_amplification4.1 C34_amplification1.1 C34_amplification2.1 C34_amplification3.1 C34_amplification4.1 R19.2 U1_PreAmp1.3 U1_PreAmp2.3 U1_PreAmp3.3 U1_PreAmp4.3 U2.15 U2.48 U3_3V3REG1.2 U3_3V3REG1.4 U5_amplification1.3 U5_amplification2.3 U5_amplification3.3 U5_amplification4.3
BIASN: C17.1 U2.10
BIASP: C10.1 U2.11
CM: U2.8 U4.5
CM_buffered: C2_PreAmp1.2 C2_PreAmp2.2 C2_PreAmp3.2 C2_PreAmp4.2 C32_amplification1.2 C32_amplification2.2 C32_amplification3.2 C32_amplification4.2 J1_PreAmp1.2 J1_PreAmp2.2 J1_PreAmp3.2 J1_PreAmp4.2 R3_PreAmp1.1 R3_PreAmp2.1 R3_PreAmp3.1 R3_PreAmp4.1 TP4.1 U1_PreAmp1.2 U1_PreAmp2.2 U1_PreAmp3.2 U1_PreAmp4.2 U4.6 U4.7 U5_amplification1.2 U5_amplification2.2 U5_amplification3.2 U5_amplification4.2
DVDD: C6.1 C7.2 C8.1 C9.2 C26_3V3REG2.2 C27.1 R8.2 R9.2 R10.2 U2.25 U2.37 U3_3V3REG2.2 U3_3V3REG2.4 U4.8
GND: B1.1 C2_PreAmp1.1 C2_PreAmp2.1 C2_PreAmp3.1 C2_PreAmp4.1 C3_PreAmp1.2 C3_PreAmp2.2 C3_PreAmp3.2 C3_PreAmp4.2 C4_PreAmp1.2 C4_PreAmp2.2 C4_PreAmp3.2 C4_PreAmp4.2 C6.2 C7.1 C8.2 C9.1 C11.1 C12.2 C13.1 C14.2 C15.1 C16.2 C17.2 C18.1 C19.1 C20.1 C22.1 C23.1 C24.1 C25_3V3REG1.1 C25_3V3REG2.1 C26_3V3REG1.1 C26_3V3REG2.1 C27.2 C28.1 C29.1 C30.1 C31.1 C32_amplification1.1 C32_amplification2.1 C32_amplification3.1 C32_amplification4.1 C33_amplification1.2 C33_amplification2.2 C33_amplification3.2 C33_amplification4.2 C34_amplification1.2 C34_amplification2.2 C34_amplification3.2 C34_amplification4.2 C35.1 C36.1 C37.1 C38.1 D1.2 D2.2 GND.1 J2.1 J3.1 J4.2 J7.6 R5.1 R6.1 R7.1 R14.1 R17.1 U1_PreAmp1.6 U1_PreAmp2.6 U1_PreAmp3.6 U1_PreAmp4.6 U2.1 U2.9 U2.13 U2.20 U2.23 U2.36 U2.49 U3_3V3REG1.1 U3_3V3REG2.1 U4.4 U5_amplification1.6 U5_amplification2.6 U5_amplification3.6 U5_amplification4.6 U6.5 U6.6 U6.7 U6.8 U6.15 U6.16 U6.17 U6.17_1 U6.17_2 U6.17_3 U6.17_4 U6.17_5 XTAL1.2 XTAL1.4
  other v1: 840,771.01 809.38,801.63 870.62,801.63 778.75,832.25 840,832.25 901.25,832.25 748.13,862.88 809.38,862.88 870.62,862.88 931.87,862.88 717.51,893.5 778.75,893.5 840,893.5 901.25,893.5 962.49,893.5 748.13,924.12 809.38,924.12 870.62,924.12 931.87,924.12 778.75,954.75 840,954.75 901.25,954.75 809.38,985.37 870.62,985.37 840,1015.99
GPIO2: J7.22 R5.2 U2.43
GPIO3: J7.26 R8.1 U2.42
GPIO4: J7.7 R10.1 U2.35
GPIO5: J7.29 U2.34
GPIO6: J7.31 U2.22
GPIO12: J5.1 J7.32
GPIO13: J5.2 J7.33
GPIO16: J5.3 J7.36
GPIO26: J5.4 J7.37
MISO: J7.21 U2.38
MOSI: J7.19 U2.39
NetC1_PreAmp1_1: C1_PreAmp1.1 R1_PreAmp1.1 R2_PreAmp1.2 U1_PreAmp1.1
NetC1_PreAmp1_2: C1_PreAmp1.2 R1_PreAmp1.2 R25_amplification1.1 U1_PreAmp1.4
NetC1_PreAmp2_1: C1_PreAmp2.1 R1_PreAmp2.1 R2_PreAmp2.2 U1_PreAmp2.1
NetC1_PreAmp2_2: C1_PreAmp2.2 R1_PreAmp2.2 R25_amplification2.1 U1_PreAmp2.4
NetC1_PreAmp3_1: C1_PreAmp3.1 R1_PreAmp3.1 R2_PreAmp3.2 U1_PreAmp3.1
NetC1_PreAmp3_2: C1_PreAmp3.2 R1_PreAmp3.2 R25_amplification3.1 U1_PreAmp3.4
NetC1_PreAmp4_1: C1_PreAmp4.1 R1_PreAmp4.1 R2_PreAmp4.2 U1_PreAmp4.1
NetC1_PreAmp4_2: C1_PreAmp4.2 R1_PreAmp4.2 R25_amplification4.1 U1_PreAmp4.4
NetC5_PreAmp1_1: C5_PreAmp1.1 R3_PreAmp1.2 R4_PreAmp1.1 U1_PreAmp1.8
NetC5_PreAmp1_2: C5_PreAmp1.2 R4_PreAmp1.2 R26_amplification1.1 U1_PreAmp1.5
NetC5_PreAmp2_1: C5_PreAmp2.1 R3_PreAmp2.2 R4_PreAmp2.1 U1_PreAmp2.8
NetC5_PreAmp2_2: C5_PreAmp2.2 R4_PreAmp2.2 R26_amplification2.1 U1_PreAmp2.5
NetC5_PreAmp3_1: C5_PreAmp3.1 R3_PreAmp3.2 R4_PreAmp3.1 U1_PreAmp3.8
NetC5_PreAmp3_2: C5_PreAmp3.2 R4_PreAmp3.2 R26_amplification3.1 U1_PreAmp3.5
NetC5_PreAmp4_1: C5_PreAmp4.1 R3_PreAmp4.2 R4_PreAmp4.1 U1_PreAmp4.8
NetC5_PreAmp4_2: C5_PreAmp4.2 R4_PreAmp4.2 R26_amplification4.1 U1_PreAmp4.5
NetC13_2: C13.2 C14.1 U2.18
NetC15_2: C15.2 C16.1 U2.12
NetC21_1: C21.1 R6.2
NetC28_2: C28.2 R16.2 R17.2 U4.3
NetC31_2: C31.2 R23.1 XTAL1.3
NetD1_1: D1.1 R18.1
NetD2_1: D2.1 R19.1
NetD3_1: D3.1 R20.2
NetD3_2: D3.2 R21.2
NetD3_3: D3.3 R22.2
NetJ1_PreAmp1_1: J1_PreAmp1.1 R2_PreAmp1.1
NetJ1_PreAmp2_1: J1_PreAmp2.1 R2_PreAmp2.1
NetJ1_PreAmp3_1: J1_PreAmp3.1 R2_PreAmp3.1
NetJ1_PreAmp4_1: J1_PreAmp4.1 R2_PreAmp4.1
NetJ4_1: J4.1 R14.2 U2.7
NetR15_1: R15.1 U4.1 U4.2
NetR24_amplification1_1: R24_amplification1.1 R25_amplification1.2 U5_amplification1.1
NetR24_amplification2_1: R24_amplification2.1 R25_amplification2.2 U5_amplification2.1
NetR24_amplification3_1: R24_amplification3.1 R25_amplification3.2 U5_amplification3.1
NetR24_amplification4_1: R24_amplification4.1 R25_amplification4.2 U5_amplification4.1
NetR26_amplification1_2: R26_amplification1.2 R27_amplification1.1 U5_amplification1.8
NetR26_amplification2_2: R26_amplification2.2 R27_amplification2.1 U5_amplification2.8
NetR26_amplification3_2: R26_amplification3.2 R27_amplification3.1 U5_amplification3.8
NetR26_amplification4_2: R26_amplification4.2 R27_amplification4.1 U5_amplification4.8
PG: R28.2 U6.4
PLLFILT: C21.2 C23.2 U2.14
SCL: J3.4 J7.5 R11.1
SCLK: J7.23 TP3.1 U2.40
SDA: J3.3 J7.3 R12.1
SS: J7.24 R9.1 U2.41
SS_TR: C38.2 U6.9
SW: L1.1 U6.1 U6.2 U6.3
V_DIG: C18.2 C19.2 C20.2 U2.19 U2.21 U2.24
XIN: C30.2 U2.16 XTAL1.1
XOUT: R23.2 U2.17
~STATUS_B: J7.40 R22.1
~STATUS_G: J7.38 R21.1
~STATUS_R: J7.35 R20.1
pads on no net: J7.2 J7.4 J7.9 J7.14 J7.17 J7.20 J7.25 J7.27 J7.28 J7.30 J7.34 J7.39 U1_PreAmp1.7 U1_PreAmp1.EPAD U1_PreAmp2.7 U1_PreAmp2.EPAD U1_PreAmp3.7 U1_PreAmp3.EPAD U1_PreAmp4.7 U1_PreAmp4.EPAD U5_amplification1.7 U5_amplification1.EPAD U5_amplification2.7 U5_amplification2.EPAD U5_amplification3.7 U5_amplification3.EPAD U5_amplification4.7 U5_amplification4.EPAD

## Polygon pours and split planes (outlines as drawn)
no net on GND (split plane): 203 vertices, not listed, extent 37.26,30.05 2790.3,2538.69
no net on 3V3 (split plane): 203 vertices, not listed, extent 37.26,30.05 2790.3,2538.69

## Silkscreen, mask and mechanical layers (free items; w line width, h text height)
Top Overlay:
  lines w7: 840,13.5 840,1103.5 1150,1413.5 1150,2003.5 1150,2493.5
EDGE CUTS:
  lines w10: 2676.77,5 1574.41,5 cw(c1577.43,44.33) 1537.99,45.28 1537.99,239.17 ccw(c1457.28,239.17) 1457.28,319.88 771.26,319.88 ccw(c770.28,250.98) 701.38,251.97 701.38,44.29 cw(c663.52,42.85) 664.96,5 150,5 cw(c150,142.8) 12.2,142.8 12.2,2426.26 cw(c149.84,2426.1) 150,2563.74 2680.71,2563.74 ; 2677.56,5 ccw(c2677.56,142.8) 2815.35,142.8 2815.35,2426.26 ccw(c2677.72,2426.1) 2677.56,2563.74

## Text inside footprints (layer, text, board x,y; h text height)
U1_PreAmp1: Top Overlay "*" at 2278.39,606 h50 r270; Mechanical 13 "*" at 2238,558.5 h50 r270
U1_PreAmp2: Top Overlay "*" at 2278.39,1116 h50 r270; Mechanical 13 "*" at 2238,1068.5 h50 r270
U1_PreAmp3: Top Overlay "*" at 2278.39,1646 h50 r270; Mechanical 13 "*" at 2238,1598.5 h50 r270
U1_PreAmp4: Top Overlay "*" at 2277.91,2166 h50 r270; Mechanical 13 "*" at 2237.53,2118.5 h50 r270
U5_amplification1: Top Overlay "*" at 1938.39,606 h50 r270; Mechanical 13 "*" at 1898,558.5 h50 r270
U5_amplification2: Top Overlay "*" at 1938.39,1116 h50 r270; Mechanical 13 "*" at 1898,1068.5 h50 r270
U5_amplification3: Top Overlay "*" at 1938.39,1646 h50 r270; Mechanical 13 "*" at 1898,1598.5 h50 r270
U5_amplification4: Top Overlay "*" at 1937.91,2166 h50 r270; Mechanical 13 "*" at 1897.53,2118.5 h50 r270